# Altium PCB rpi-hat-v4a.PcbDoc
Units mm, origin at the board's own origin, x right, y up, seen from the top; angles counter-clockwise.
Board outline 64 x 55 mm, 2 copper layers (Top Layer, Bottom Layer), stack 1.572 mm thick; 44 components, 58 nets, 496 pads, 94 vias.
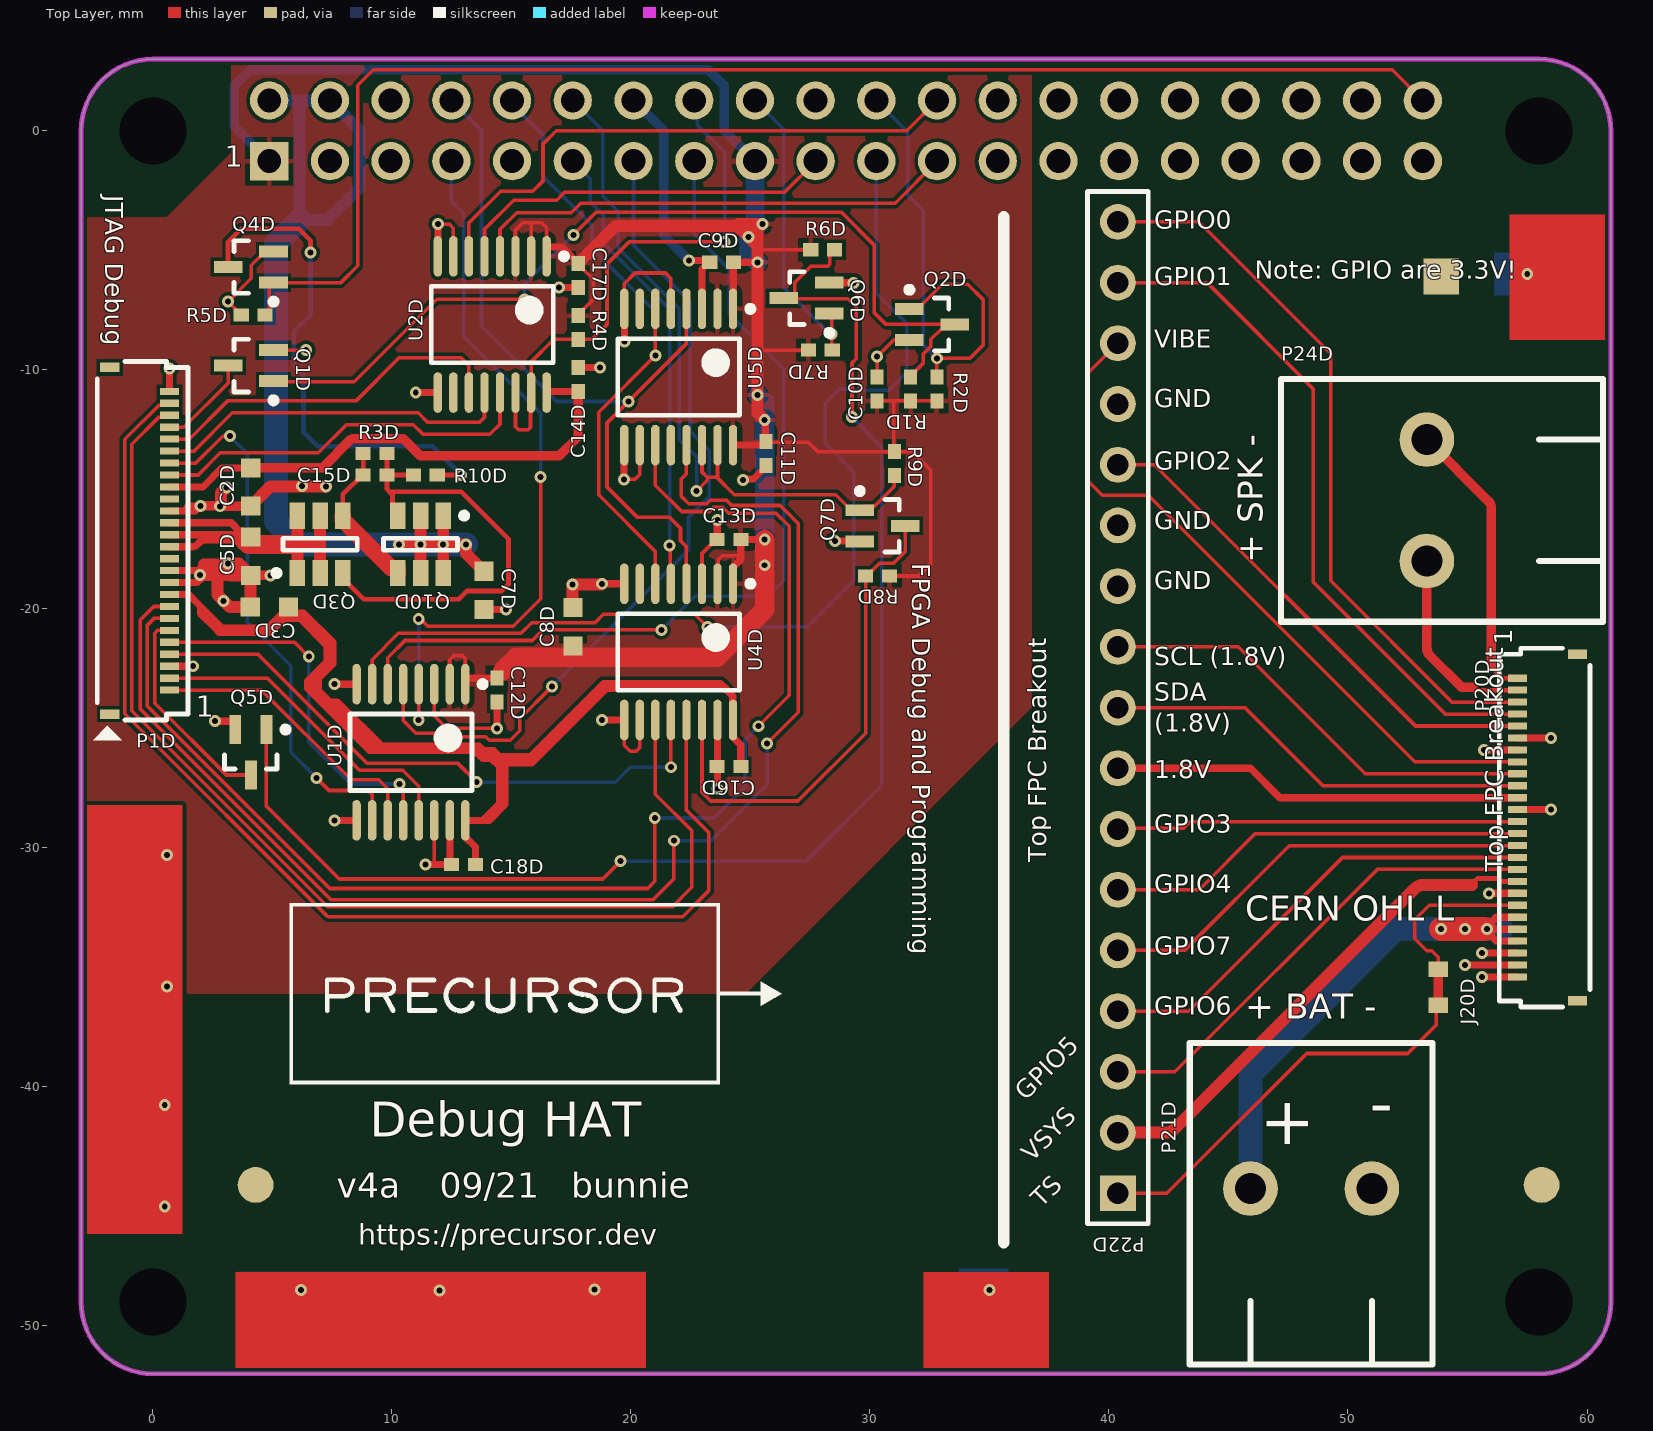
[diagram p0: Top Layer view]
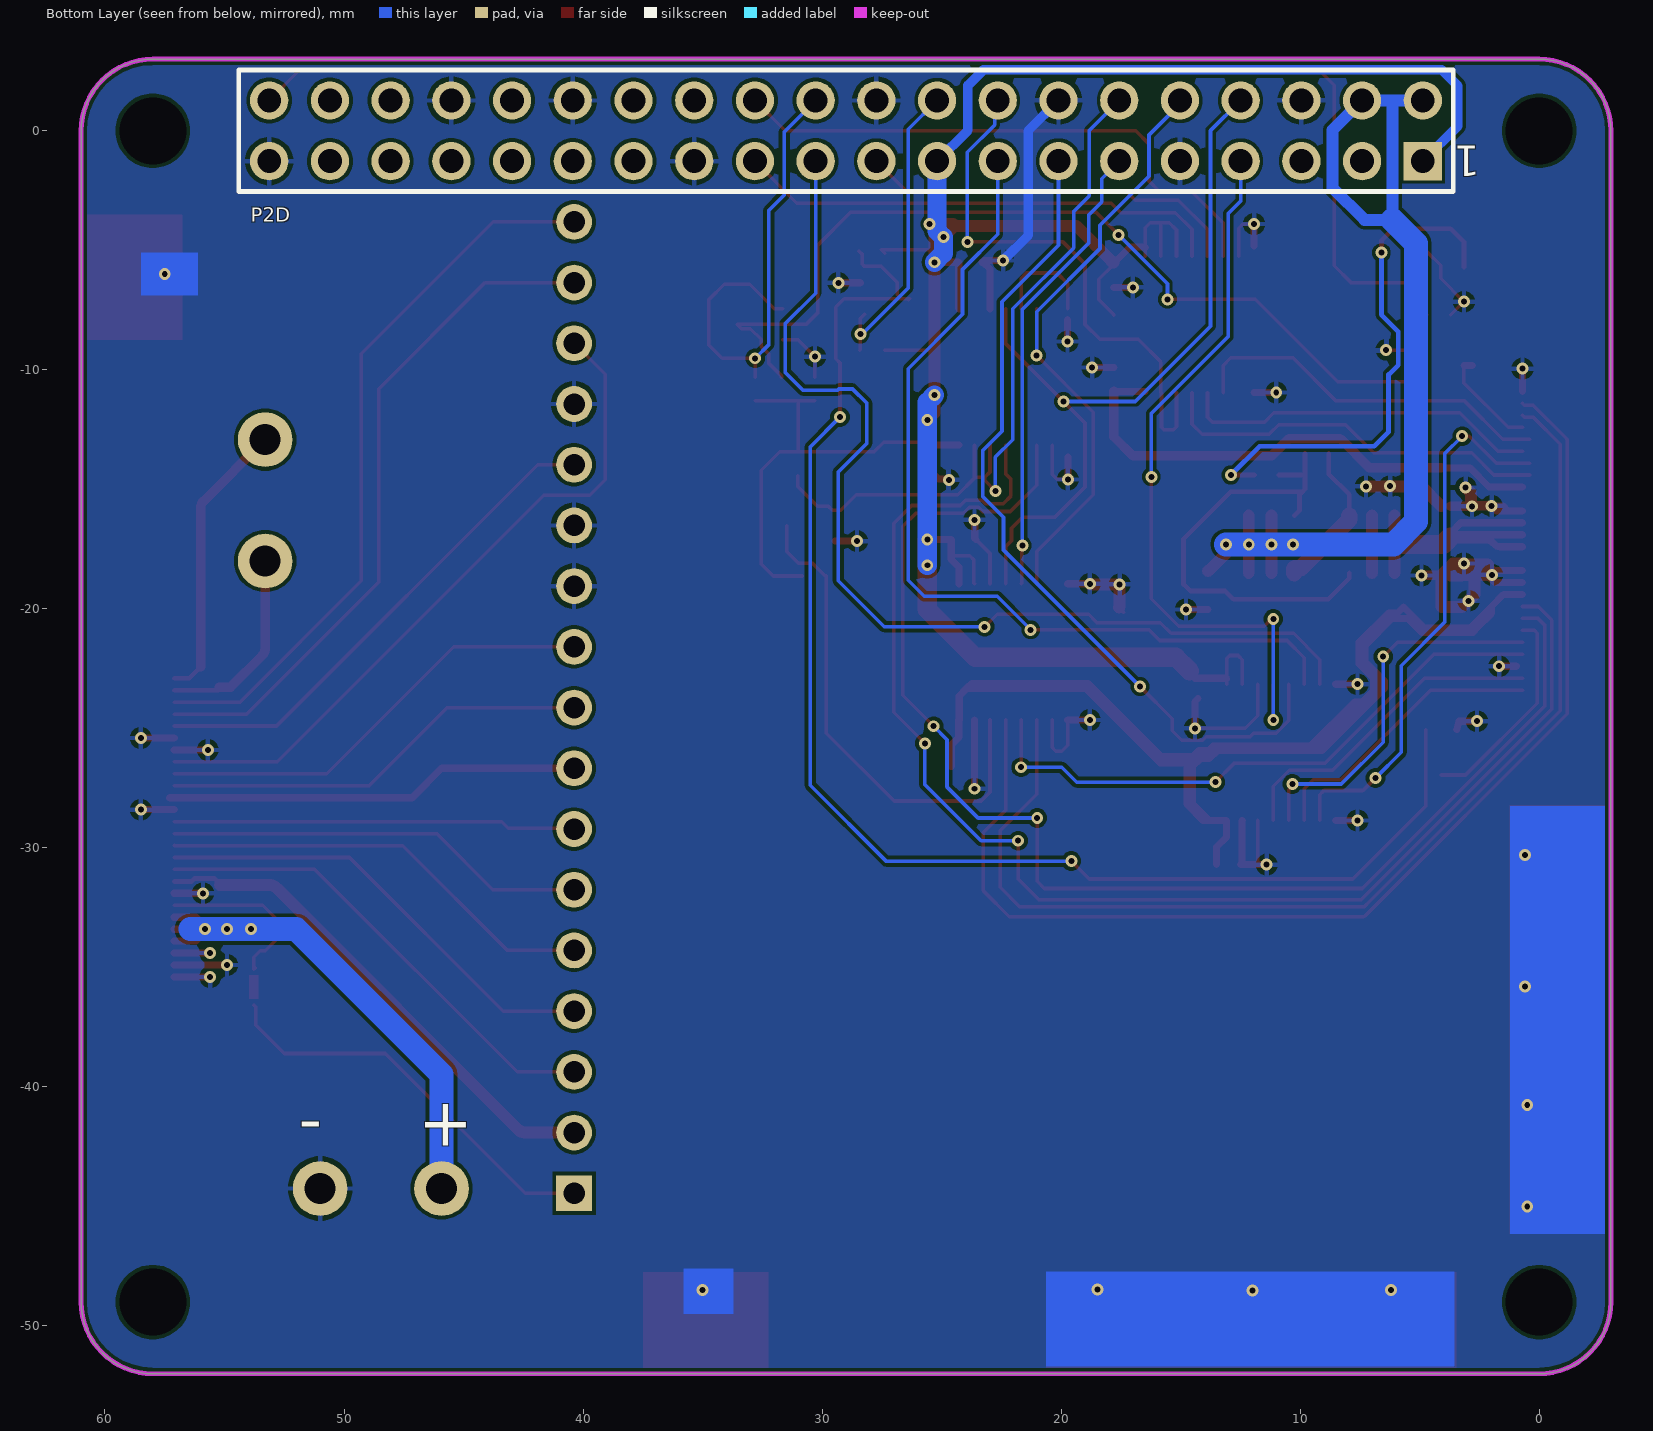
[diagram p1: Bottom Layer view, seen from below]

## Layer stack, top to bottom
Top Solder (Pantone 7452C): solder mask 0.01, Solder Resist, Dk 3.5
Top Layer: signal copper 0.036
Dielectric 2: prepreg 1.5, FR-4, Dk 4.2
Bottom Layer: signal copper 0.036
Bottom Solder (Pantone 7452C): solder mask 0.01, Solder Resist, Dk 3.5

## Board outline
-3,-49 -3,0 cw(c0,0) 0,3 58,3 cw(c58,0) 61,0 61,-49 cw(c58,-49) 58,-52 0,-52 cw(c0,-49)

## Design rules (kind name [scope] priority, off if disabled: settings)
Clearance [All] p1: gap=0.15 ignorepadtopadclearanceinfootprint=FALSE
DiffPairsRouting [All] p1: maxlimit=0.127 minlimit=0.127 mostfreqgap=0.127 toplayer_minwidth=0.3 toplayer_maxwidth=0.561 toplayer_prefwidth=0.561 bottomlayer_minwidth=0.3 bottomlayer_maxwidth=0.561 bottomlayer_prefwidth=0.561 impedanceprofiledriven=TRUE impedanceprofileid={78217CE3-51FE-490B-95B5-2C22C78E4475} impedanceprofilevalue=90.000000 maxuncoupledlength=12.7
HoleSize [All] p1: absolutevalues=TRUE maxlimit=4 minlimit=0.025 maxpercent=80.000 minpercent=20.000
MinimumSolderMaskSliver [All] p1 off: minsoldermaskwidth=0.254
PolygonConnect [All] p1: connectstyle=Relief reliefconductorwidth=0.2 reliefentries=4 polygonreliefangle="90 Angle" airgapwidth=0.2
RoomDefinition breakout [InComponentClass('breakout')] p1 off: confinementstyle=ConfineIn formatcopy=TRUE lockcomponents=FALSE outline 62,-50.25 64.5,-50.25 64.5,-16.5 62,-16.5
RoomDefinition debug [InComponentClass('debug')] p2 off: confinementstyle=ConfineIn formatcopy=TRUE lockcomponents=FALSE outline 73.943,-50.777 75.467,-50.777 75.467,-38.331 73.943,-38.331
RoutingVias [All] p1: holewidth=0.25 width=0.5 viastyle="Through Hole" minholewidth=0.25 minwidth=0.5 maxholewidth=0.25 maxwidth=0.5
SilkToSilkClearance [All] p1 off: silktosilkclearance=0.254
SilkToSolderMaskClearance [IsPad] p1 off: minsilkscreentomaskgap=0.254 clearancetoexposedcopper=TRUE
SolderMaskExpansion [All] p1: expansion=0.102 istentingtop=FALSE
Width [All] p1: maxlimit=3 minlimit=0.15 preferedwidth=0.15
25 further rules are at their usual default settings.

## Classes and differential pairs
component class breakout: J20D P20D P21D P22D P24D
component class debug: C2D C3D C5D C7D C8D C9D C10D C11D C12D C13D C14D C15D C16D C17D C18D NT1D P1D P2D Q1D Q2D Q3D Q4D Q5D Q6D Q7D Q10D R1D R2D R3D R4D R5D R6D R7D R8D R9D R10D U1D U2D U4D U5D

## Components (designator, comment, footprint, x,y, rotation, side; value= is the part's Value field where it differs from the comment)
C2D "10uF, 6.3V, X5R" B_CAP0603 4.1,-14.9 r270 top
C3D "10uF, 6.3V, X5R" B_CAP0603 4.876,-19.923 r180 top
C5D "10uF, 6.3V, X5R" B_CAP0603 4.1,-17.8 r270 top
C7D "10uF, 6.3V, X5R" B_CAP0603 13.85,-19.225 r270 top
C8D "10uF, 6.3V, X5R" B_CAP0603 17.575,-20.75 r90 top
C9D "0.1uF, 10V, X5R" B_CAP0402 23.8,-5.5 r180 top
C10D "0.1uF, 10V, X5R" B_CAP0402 30.3,-10.8 r90 top
C11D "0.1uF, 10V, X5R" B_CAP0402 25.65,-13.5 r270 top
C12D "0.1uF, 10V, X5R" B_CAP0402 14.4,-23.4 r270 top
C13D "0.1uF, 10V, X5R" B_CAP0402 24.1,-17.1 r180 top
C14D "0.1uF, 10V, X5R" B_CAP0402 17.8,-10.4 r90 top
C15D "0.1uF, 10V, X5R" B_CAP0402 9.3,-14.4 r0 top
C16D "0.1uF, 10V, X5R" B_CAP0402 24.1,-26.6 r180 top
C17D "0.1uF, 10V, X5R" B_CAP0402 17.8,-6.05 r270 top
C18D "0.1uF, 10V, X5R" B_CAP0402 13,-30.7 r180 top
J20D "TP (DNP)" RESTAP-0603 53.775,-35.825 r90 top
P1D "26-pin FPC" HRS_FH34SRJ-26S-0.5SH(50) 0.7,-17.15 r270 top
P2D "Header 20X2" SAMTEC_SSW-120-01-F-D 4.87,1.27 r0 bottom
P20D "26-pin FPC" HRS_FH34SRJ-26S-0.5SH(50) 57.1,-29.15 r90 top
P21D "1716060000" weidmuller_1716060000 45.92,-44.25 r0 top
P22D "Header 17" HDR1X17 40.375,-44.45 r90 top
P24D "1716060000" weidmuller_1716060000 53.3,-18 r90 top
Q1D "DMG1012UW-7" SOT323-3AN 4.1,-9.825 r180 top
Q2D "DMG1012UW-7" SOT323-3AN 32.6,-8.1 r0 top
Q3D "Si3493DDV" SOT26A-6N 7,-17.3 r90 top
Q4D "DMG1012UW-7" SOT323-3AN 4.1,-5.7 r180 top
Q5D "DMG1012UW-7" SOT323-3AN 4.1,-26 r270 top
Q6D "DMG1012UW-7" SOT323-3AN 27.35,-7 r180 top
Q7D "DMG1012UW-7" SOT323-3AN 30.525,-16.525 r0 top
Q10D "Si3493DDV" SOT26A-6N 11.2,-17.3 r270 top
R1D "4.7k, 1%" B_RES0402 31.7,-10.8 r270 top
R2D "4.7k, 1%" B_RES0402 32.8,-10.8 r270 top
R3D "4.7k, 1%" B_RES0402 9.3,-13.5 r0 top
R4D "4.7k, 1%" B_RES0402 17.8,-8.225 r90 top
R5D "4.7k, 1%" B_RES0402 4.2,-7.7 r0 top
R6D "4.7k, 1%" B_RES0402 28.025,-4.975 r180 top
R7D "4.7k, 1%" B_RES0402 27.925,-9.175 r180 top
R8D "4.7k, 1%" B_RES0402 30.325,-18.625 r0 top
R9D "4.7k, 1%" B_RES0402 31.025,-13.925 r90 top
R10D "4.7k, 1%" B_RES0402 11.4,-14.4 r0 top
U1D "74AVC4T245PW" TSOP65P640-16AN 10.8,-26 r270 top
U2D "74AVC4T245PW" TSOP65P640-16AN 14.2,-8.1 r270 top
U4D "74AVC4T245PW" TSOP65P640-16AN 22,-21.8 r270 top
U5D "74AVC4T245PW" TSOP65P640-16AN 22,-10.3 r270 top

## Footprints (in the part's own frame and the unit in brackets; to place one, negate y for a bottom-side part, rotate by r counter-clockwise, add the part's x,y. Pads: shape width x height; smd on the part's side, far side on the other; paste and mask are expansions set on the pad)
B_CAP0402 [mm] "Capacitor 0402"
  rect 0.63x0.55 smd mask+0.07: 1(-0.5,0) 2(0.5,0)
  body extent -0.53,-0.27 0.53,0.28, height 0.4
B_CAP0603 [mm] "Capacitor 0603"
  rect 0.8x0.8 smd mask+0.07: 1(-0.8,0) 2(0.8,0)
  body extent -0.85,-0.45 0.85,0.45, height 0.9
B_RES0402 [mm] "Resistor 0402"
  rect 0.63x0.55 smd mask+0.07: 1(-0.5,0) 2(0.5,0)
  body extent -0.53,-0.27 0.53,0.28, height 0.4
HDR1X17 [mm] "Connector; Header; 17 Position"
  rect 1.5x1.5 hole 0.9: 1(0,0)
  round 1.5 hole 0.9: 2(2.54,0) 3(5.08,0) 4(7.62,0) 5(10.16,0) 6(12.7,0) 7(15.24,0) 8(17.78,0) 9(20.32,0) 10(22.86,0) 11(25.4,0) 12(27.94,0) 13(30.48,0) 14(33.02,0) 15(35.56,0) 16(38.1,0) 17(40.64,0)
  silkscreen extent -1.27,-1.27 41.91,1.27
HRS_FH34SRJ-26S-0.5SH(50) [mm] "Top/bottom entry, back-lock 0.3mm thick FPC, 26 pins"
  rect 0.4x0.8 smd mask+0.07: 0(-7.25,-2.5) 0(7.25,-2.5)
  rect 0.3x0.8 smd mask+0.07: 1(6.25,0) 2(5.75,0) 3(5.25,0) 4(4.75,0) 5(4.25,0) 6(3.75,0) 7(3.25,0) 8(2.75,0) 9(2.25,0) 10(1.75,0) 11(1.25,0) 12(0.75,0) 13(0.25,0) 14(-0.25,0) 15(-0.75,0) 16(-1.25,0) 17(-1.75,0) 18(-2.25,0) 19(-2.75,0) 20(-3.25,0) 21(-3.75,0) 22(-4.25,0) 23(-4.75,0) 24(-5.25,0) 25(-5.75,0) 26(-6.25,0)
  silkscreen extent -7.5,-3.03 7.5,0.77, body extent -7.5,-3.02 7.5,0.78, height 1
RESTAP-0603 [mm] "0603 Power tap, cut-trace style"
  rect 0.65x0.8 smd: 1(-0.75,0) 1(0.75,0)
  Top Layer region: -0.5,-0.2 0.5,-0.2 0.5,0.2 -0.5,0.2
  body extent -0.8,-0.4 0.8,0.4, height 0.8
SAMTEC_SSW-120-01-F-D [mm] "2x20 2.54mm female header with standard solder tails"
  rect 1.6x1.6 hole 1: 1(0,2.54)
  round 1.6 hole 1: 2(0,0) 3(2.54,2.54) 4(2.54,0) 5(5.08,2.54) 6(5.08,0) 7(7.62,2.54) 8(7.62,0) 9(10.16,2.54) 10(10.16,0) 11(12.7,2.54) 12(12.7,0) 13(15.24,2.54) 14(15.24,0) 15(17.78,2.54) 16(17.78,0) 17(20.32,2.54) 18(20.32,0) 19(22.86,2.54) 20(22.86,0) 21(25.4,2.54) 22(25.4,0) 23(27.94,2.54) 24(27.94,0) 25(30.48,2.54) 26(30.48,0) 27(33.02,2.54) 28(33.02,0) 29(35.56,2.54) 30(35.56,0) 31(38.1,2.54) 32(38.1,0) 33(40.64,2.54) 34(40.64,0) 35(43.18,2.54) 36(43.18,0) 37(45.72,2.54) 38(45.72,0) 39(48.26,2.54) 40(48.26,0)
  silkscreen extent -1.27,-1.27 49.53,3.81, body extent -1.53,-1.2 49.78,3.75, height 8.51
SOT26A-6N [mm] "SOT23, 6-Leads, Body 2.9x1.7mm, Pitch 0.95mm, Lead Span 2.8mm, IPC Medium Density"
  rect 1.1x0.65 smd: 1(-1.2,0.95) 2(-1.2,0) 3(-1.2,-0.95) 4(1.2,-0.95) 5(1.2,0) 6(1.2,0.95)
  silkscreen extent -1.32,-1.55 0.25,1.95, body extent -0.9,-1.55 0.9,1.55, height 1.45
SOT323-3AN [mm] "SOT323, 3-Leads, Body 2.0x1.3mm, Pitch 0.65mm, Lead Span 2.1mm, IPC Medium Density"
  rect 1.2x0.5 smd: 1(-0.95,0.65) 2(-0.95,-0.65) 3(0.95,0)
  silkscreen extent -1.07,-1.1 0.7,1.57, body extent -0.7,-1.1 0.7,1.1, height 1
TSOP65P640-16AN [mm] "TSOP, 16-Leads, Body 5x4.4mm, Pitch 0.65mm, IPC Medium Density"
  oval 1.7x0.35 smd: 1(-2.85,2.275) 2(-2.85,1.625) 3(-2.85,0.975) 4(-2.85,0.325) 5(-2.85,-0.325) 6(-2.85,-0.975) 7(-2.85,-1.625) 8(-2.85,-2.275) 9(2.85,-2.275) 10(2.85,-1.625) 11(2.85,-0.975) 12(2.85,-0.325) 13(2.85,0.325) 14(2.85,0.975) 15(2.85,1.625) 16(2.85,2.275)
  silkscreen extent -2.97,-2.55 1.6,3.13, body extent -2.25,-2.55 2.25,2.55, height 1.1
weidmuller_1716060000 [mil]
  round 90 hole 51.18: 1(0,0) 2(200,0)
  silkscreen extent -100,-290 300,240

## Part data
C2D C3D C5D C7D C8D: library part "Cap Semi", "Capacitor (Semiconductor SIM Model)", MPN=CL10A106MQ8NNNC, MYPN=C-106-6.3-X5R-0603, VENDOR=Samsung
C9D C10D C11D C12D C13D C14D C15D C16D C17D C18D: library part "Cap Semi", "Capacitor (Semiconductor SIM Model)", MPN=CL05A104KP5NNNC, MYPN=C-104-10-X5R-0402, VENDOR=Samsung
J20D: library part CON1, "Connector", MPN=DNP, MYPN=J-TP-PWRTAP-0603, VENDOR=DNP
P1D P20D: library part FPC-26, "26 Pin FPC header", MPN=FH34SRJ-26S-0.5SH(99), MYPN=J-FPC-0.5mm-26-0.3mm-T/B, VENDOR=Hirose
  P20D: System=Connector
P2D: "Header, 20-Pin, Dual row", MPN=CS25402-40G-S85-C, LatestRevisionDate=17-Jul-2002, LatestRevisionNote="Re-released for DXP Platform.", MYPN=P-SSW-120-01-F-D, Publisher="Altium Limited", VENDOR=Kaweei
P21D P24D: library part "Header 2", "Header, 2-Pin", LatestRevisionDate=17-Jul-2002, LatestRevisionNote="Re-released for DXP Platform.", MPN=1716060000, MYPN=J-TB-2P-5.08, Publisher="Altium Limited", VENDOR=Weidmuller
P22D: "Header, 17-Pin", LatestRevisionDate=17-Jul-2002, LatestRevisionNote="Re-released for DXP Platform.", Publisher="Altium Limited"
Q1D Q2D Q4D Q5D Q6D Q7D: library part MOSFET-N, "N-Channel MOSFET", LatestRevisionDate=17-Jul-2002, LatestRevisionNote="Re-released for DXP Platform.", MPN=DMG1012UW-7, MYPN=Q-DMG1012UW-7, PackageReference=E3, PackageVersion=1995/1996, Published=8-Jun-2000, Publisher="Altium Limited", VENDOR="Diodes Inc"
Q3D Q10D: "P-channel 20V 8A 32mOhm @ -2.5V", MPN=SI3493DDV-T1-GE3, MYPN=Q-SI3493DDV-T1-GE3, VENDOR="Vishay Siliconix"
R1D R2D R3D R4D R5D R6D R7D R8D R9D R10D: library part Res1, "Resistor", MPN=ANY, MYPN=R-472-1P-1_16W-0402, VENDOR=ANY
U1D U2D U4D U5D: library part 74AVC4T245, "4-bit dual supply translating transceiver with configurable voltage translation; 3-state; standard pinout", MPN=74AVC4T245PW, MYPN=U-74AVC4T245PW, VENDOR=Nexperia

## Free pads (board coordinates)
  round 2.7 hole 2.8 unplated mask+1.2: 0(0,-49) 0(0,0) 0(58,-49) 0(58,0)
  rect 2.54x0.051 on Top Overlay: 1(47.212,-29.144) 1(47.212,-29.094) 1(47.212,-29.043) 1(47.212,-28.992) 1(47.212,-28.941) 1(47.212,-28.89) 1(47.212,-28.84) 1(47.212,-28.789) 1(47.212,-28.738) 1(47.212,-28.687) 1(47.212,-28.636) 1(47.212,-28.586) 1(47.314,-28.382) 1(51.632,-28.382) 1(51.733,-29.144) 1(51.733,-28.738) 1(51.733,-28.586) 1(51.733,-29.195) 1(51.733,-29.094) 1(51.733,-29.043) 1(51.733,-28.992) 1(51.733,-28.789) 1(51.733,-28.687) 1(51.733,-28.636)
  rect 2.591x0.051 on Top Overlay: 1(47.238,-29.297) 1(47.238,-28.535) 1(47.238,-29.246) 1(47.238,-29.195) 1(47.238,-28.484) 1(47.288,-29.348) 1(51.657,-29.348) 1(51.708,-29.297) 1(51.708,-29.246) 1(51.708,-28.535) 1(51.708,-28.484) 1(51.708,-28.433)
  rect 2.642x0.051 on Top Overlay: 1(47.263,-28.433)
  rect 0.102x0.051 on Top Overlay: 1(47.314,-26.096) 1(48.381,-31.329) 1(50.565,-31.329) 1(51.632,-26.096)
  rect 0.152x0.051 on Top Overlay: 1(47.339,-31.634) 1(51.606,-31.634)
  rect 0.254x0.051 on Top Overlay: 1(47.339,-31.583) 1(47.339,-26.147) 1(48.355,-31.278) 1(50.59,-31.278) 1(51.606,-31.583) 1(51.606,-26.147)
  rect 0.356x0.051 on Top Overlay: 1(47.339,-26.198) 1(48.304,-31.227) 1(50.641,-31.227) 1(51.606,-26.198) 1(51.606,-31.532)
  rect 0.406x0.051 on Top Overlay: 1(47.365,-31.532)
  rect 0.508x0.051 on Top Overlay: 1(47.365,-31.481) 1(47.365,-26.249) 1(51.581,-31.481)
  rect 0.61x0.051 on Top Overlay: 1(47.365,-26.3) 1(51.581,-31.43) 1(51.581,-26.3)
  rect 0.66x0.051 on Top Overlay: 1(47.39,-31.43)
  rect 0.762x0.051 on Top Overlay: 1(47.39,-31.38) 1(47.39,-26.35) 1(51.556,-31.38)
  rect 0.864x0.051 on Top Overlay: 1(47.39,-31.329) 1(47.39,-26.401) 1(49.473,-25.334) 1(51.556,-31.329) 1(51.556,-26.401)
  rect 0.965x0.051 on Top Overlay: 1(47.39,-26.452) 1(49.473,-25.385) 1(49.473,-25.487) 1(49.473,-25.436) 1(51.556,-26.452)
  rect 1.118x0.051 on Top Overlay: 1(47.415,-31.227) 1(47.415,-26.503) 1(49.498,-25.842) 1(51.53,-31.227) 1(51.53,-26.503)
  rect 1.219x0.051 on Top Overlay: 1(47.415,-26.554) 1(49.498,-26.096) 1(51.53,-26.554)
  rect 1.016x0.051 on Top Overlay: 1(47.415,-31.278) 1(49.498,-25.538) 1(51.53,-31.278)
  rect 2.337x0.051 on Top Overlay: 1(47.415,-29.398) 1(50.768,-27.874) 1(51.53,-29.398)
  rect 2.286x0.051 on Top Overlay: 1(47.492,-28.332) 1(48.203,-27.874) 1(51.505,-28.332)
  rect 2.134x0.051 on Top Overlay: 1(47.568,-29.449) 1(48.076,-27.925) 1(50.87,-27.925) 1(51.378,-29.449)
  rect 1.93x0.051 on Top Overlay: 1(47.619,-31.024) 1(47.873,-29.652) 1(47.923,-29.703) 1(47.923,-28.027) 1(48.025,-30.008) 1(48.025,-29.957) 1(50.921,-30.008) 1(50.921,-29.957) 1(51.022,-29.703) 1(51.022,-28.027) 1(51.327,-31.024)
  rect 1.829x0.051 on Top Overlay: 1(47.619,-31.075) 1(47.72,-30.821) 1(47.771,-30.77) 1(47.771,-30.719) 1(47.771,-28.23) 1(47.822,-30.668) 1(47.822,-29.602) 1(47.822,-29.551) 1(47.822,-28.179) 1(47.873,-28.128) 1(48.025,-30.16) 1(48.025,-30.11) 1(50.921,-30.16) 1(50.921,-30.11) 1(51.124,-29.602) 1(51.124,-28.179) 1(51.175,-30.719) 1(51.175,-29.551) 1(51.175,-28.23) 1(51.225,-30.821) 1(51.327,-31.075)
  rect 2.032x0.051 on Top Overlay: 1(47.619,-28.281) 1(48.025,-29.906) 1(48.025,-29.856) 1(48.025,-29.805) 1(50.921,-29.906) 1(50.921,-29.856) 1(50.971,-29.805) 1(51.327,-28.281)
  rect 1.778x0.051 on Top Overlay: 1(47.644,-31.126) 1(47.847,-30.618) 1(47.847,-30.567) 1(47.898,-30.516) 1(47.949,-30.414) 1(50.997,-30.414) 1(51.048,-30.516) 1(51.098,-30.618) 1(51.098,-30.567) 1(51.149,-30.668) 1(51.302,-31.126)
  rect 1.88x0.051 on Top Overlay: 1(47.644,-30.973) 1(47.695,-30.922) 1(47.695,-30.872) 1(47.746,-29.5) 1(47.898,-28.078) 1(48.05,-30.059) 1(50.946,-30.059) 1(51.048,-28.078) 1(51.098,-29.652) 1(51.098,-28.128) 1(51.2,-29.5) 1(51.2,-30.77) 1(51.251,-30.872) 1(51.302,-30.973) 1(51.302,-30.922)
  rect 1.727x0.051 on Top Overlay: 1(47.669,-31.176) 1(47.923,-30.465) 1(47.974,-30.364) 1(48.025,-30.313) 1(48.025,-30.262) 1(48.025,-30.211) 1(49.498,-26.401) 1(50.921,-30.262) 1(50.921,-30.211) 1(50.971,-30.364) 1(51.022,-30.465)
  rect 1.981x0.051 on Top Overlay: 1(47.949,-29.754) 1(48,-27.976) 1(49.473,-26.452) 1(50.946,-27.976) 1(50.997,-29.754)
  rect 4.724x0.051 on Top Overlay: 1(49.473,-27.671) 1(49.473,-27.722) 1(49.473,-27.366)
  rect 4.623x0.051 on Top Overlay: 1(49.473,-27.62) 1(49.473,-27.57) 1(49.473,-27.519) 1(49.473,-27.468)
  rect 4.928x0.051 on Top Overlay: 1(49.473,-27.214)
  rect 5.334x0.051 on Top Overlay: 1(49.473,-26.909) 1(49.473,-26.96)
  rect 5.436x0.051 on Top Overlay: 1(49.473,-26.858) 1(49.473,-26.604)
  rect 2.184x0.051 on Top Overlay: 1(49.473,-26.503)
  rect 1.27x0.051 on Top Overlay: 1(49.473,-26.147) 1(49.473,-26.3) 1(49.473,-26.249) 1(49.473,-26.198)
  rect 1.067x0.051 on Top Overlay: 1(49.473,-25.792) 1(49.473,-25.741) 1(49.473,-25.69) 1(49.473,-25.639) 1(49.473,-25.588)
  rect 4.826x0.051 on Top Overlay: 1(49.473,-27.824) 1(49.473,-27.773) 1(49.473,-27.316)
  rect 5.029x0.051 on Top Overlay: 1(49.473,-27.163)
  rect 5.131x0.051 on Top Overlay: 1(49.473,-27.062)
  rect 5.232x0.051 on Top Overlay: 1(49.473,-27.011)
  rect 5.537x0.051 on Top Overlay: 1(49.473,-26.808) 1(49.473,-26.757) 1(49.473,-26.655)
  rect 5.639x0.051 on Top Overlay: 1(49.473,-26.706)
  rect 2.489x0.051 on Top Overlay: 1(49.473,-26.554) 1(51.759,-28.941) 1(51.759,-28.89) 1(51.759,-28.84)
  rect 1.473x0.051 on Top Overlay: 1(49.473,-26.35)
  rect 1.168x0.051 on Top Overlay: 1(49.473,-26.046) 1(49.473,-25.995) 1(49.473,-25.944) 1(49.473,-25.893)
  rect 4.877x0.051 on Top Overlay: 1(49.498,-27.265)
  rect 4.674x0.051 on Top Overlay: 1(49.498,-27.417)
  rect 5.08x0.051 on Top Overlay: 1(49.498,-27.112)
  rect 1.676x0.051 on Top Overlay: 1(50.946,-30.313) 1(51.302,-31.176)
  rect 0.711x0.051 on Top Overlay: 1(51.581,-26.35)
  rect 0.457x0.051 on Top Overlay: 1(51.606,-26.249)
  round 1.5 smd mask+1.5: 2(4.3,-44.1) 3(58.1,-44.1)
  rect 1.5x1.5 smd mask+1.5: 4(53.9,-6.1)

## Via types
v1: diameter 0.5, hole 0.25, Top Layer to Bottom Layer, tented both sides, 94 vias

## Nets (pads, with @x,y where several pads share a name; then routed paths per layer and width w, separated by ;. In a path a pad name is that pad's centre, name@x,y a point inside that pad or via, vN(x,y) a via of type N, cw(c..) or ccw(c..) an arc to the next point about the centre after c; other vN are vias at no path point)
B2B_CTL: Q4D.3 R10D.2 | length 21.7
  Top Layer w0.2: Q4D.3 3.15,-4.65 3.7,-4.1 6.1,-4.1 6.6,-4.6 v1(6.6,-5.1) ; R10D.2 v1(12.9,-14.4)
  Bottom Layer w0.2: v1(6.6,-5.1) 6.6,-7.7 5.9,-8.4 5.9,-9.8 6.3,-10.2 6.3,-12.6 6.9,-13.2 11.7,-13.2 v1(12.9,-14.4)
B2B_G: C15D.2 Q3D.3 Q10D.3 R3D.2 R10D.1 | length 19.3
  Top Layer w0.2: Q3D.3 7.95,-18.725 8.825,-19.6 12.8,-19.6 13.15,-19.25 14.6,-19.25 14.875,-18.975 14.875,-17.075 12.9,-15.1 9.925,-15.1 9.912,-15.112 ; R3D.2 C15D.2 ; Q10D.3 10.025,-15.875 10.025,-15.225 9.912,-15.112 ; R10D.1 C15D.2 ; C15D.2 9.8,-15 9.912,-15.112
B2B_S: C15D.1 Q3D.4 Q10D.4 R3D.1 | length 6.5
  Top Layer w0.2: Q3D.4 7.95,-15.21 8.8,-14.36 R3D.1
  Top Layer w0.7: Q3D.4 7.95,-16.275 9.975,-18.3 10.225,-18.3 10.25,-18.325 Q10D.4
CHG_TS: J20D.1 P20D.20 P22D.1 | length 24.3
  Top Layer w0.15: P22D.1 42.425,-44.45 48.275,-38.6 52.5,-38.6 53.7,-37.4 53.7,-36.65 J20D.1@53.775,-36.575 ; J20D.1@53.725,-35.025 53.775,-35.075 53.775,-34.575 53.5,-34.3 53.3,-34.3 52.8,-33.8 52.8,-33 53.4,-32.4 P20D.20
CRESET_3V: Q1D.1 Q2D.3 R1D.1 | length 38.6
  Top Layer w0.15: Q1D.1 5.075,-10.5 8.425,-10.5 11.875,-7.05 v1(15.55,-7.05) ; v1(17.6,-4.35) 18.55,-3.4 28.8,-3.4 30.175,-4.775 30.175,-7.6 30.675,-8.1 Q2D.3 33.375,-8.275 33,-8.275 32.55,-8.725 32.55,-9.025 32.225,-9.35 32.225,-9.735 31.7,-10.26 R1D.1
  Bottom Layer w0.15: v1(15.55,-7.05) 15.55,-6.4 v1(17.6,-4.35)
CRESET_B: P1D.23 Q1D.3 | length 4.3
  Top Layer w0.15: P1D.23 0.8,-12.4 0.9,-12.4 1.3,-12.4 3.15,-10.55 Q1D.3
  Top Layer w0.3: Q1D.3@2.8,-9.825 Q1D.3
CRESET_N_3V: P2D.22 Q2D.1 R2D.1 | length 20.5
  Top Layer w0.15: Q2D.1 32,-7.45 33.025,-6.425 34.1,-6.425 34.75,-7.075 34.75,-8.95 34.184,-9.516 v1(32.8,-9.516) R2D.1
  Bottom Layer w0.15: P2D.22 31.575,-0.035 31.575,-2.675 32.225,-3.325 32.225,-8.941 v1(32.8,-9.516)
DRV_UP5K_N: P2D.16 R4D.1 U2D.14 U2D.15 | length 23
  Top Layer w0.15: U2D.14 15.175,-12.375 15.3,-12.5 15.7,-12.5 15.8,-12.4 15.8,-10.975 U2D.15 15.825,-9.675 16.775,-8.725 R4D.1 18.375,-8.725 19,-8.1 19,-5.575 19.925,-4.65 v1(23.925,-4.65)
  Bottom Layer w0.15: P2D.16 22.78,1.14 22.78,0.245 23.925,-0.9 v1(23.925,-4.65)
F_UART_RX: P1D.25 U4D.13 | length 49.9
  Top Layer w0.15: P1D.25 0.625,-11.475 0.257,-11.475 -1.131,-12.863 ccw(c-1.025,-12.969) -1.175,-12.969 -1.175,-22.526 -1.175,-24.39 7.266,-32.831 ; 7.266,-32.832 ccw(c7.372,-32.725) 7.372,-32.875 10.087,-32.875 22.175,-32.875 23.25,-31.8 23.25,-29.35 22.325,-28.425 U4D.13
F_UART_TX: P1D.24 U4D.11 | length 48
  Top Layer w0.15: P1D.24 0.625,-11.975 0.257,-11.975 -0.875,-13.107 -0.875,-24.266 7.066,-32.207 7.33,-32.47 21.73,-32.47 22.55,-31.65 22.55,-29.275 21.025,-27.75 U4D.11
GND: C2D.2 C3D.2 C5D.2 C7D.2 C8D.2 C9D.2 C10D.2 C11D.2 C12D.2 C13D.2 C14D.2 C16D.2 C17D.2 C18D.2 P1D.3 P1D.10 P1D.11 P1D.16 P1D.26 P2D.6 P2D.9 P2D.14 P2D.20 P2D.25 P2D.30 P2D.34 P2D.39 P20D.6 P20D.7 P20D.12 P20D.19 P20D.24 P20D.25 P20D.26 P21D.2 P22D.11 P22D.12 P22D.14 Q1D.2 Q2D.2 Q4D.2 Q5D.2 Q6D.2 Q7D.2 R5D.1 U1D.3 U1D.8 U1D.9 U1D.14 U1D.15 U2D.7 U2D.8 U2D.9 U4D.3 U4D.8 U4D.9 U4D.10 U4D.15 U5D.3 U5D.5 U5D.8 U5D.9 U5D.10 | length 101.9
  Top Layer w0.15: R5D.1 v1(3.15,-7.15) 4.125,-6.175 4.125,-5.625 4.7,-5.05 Q4D.2 ; Q1D.2 v1(6.4,-9.175) ; 11.725,-30.7 11.775,-30.65 U1D.14 ; U1D.3 11.775,-24.475 12.3,-25 v1(14.4,-25) ; v1(11.927,-3.901) 12.401,-3.901 12.575,-4.075 U2D.7 ; C8D.2@17.375,-20.15 C8D.2 ; v1(19.719,-14.584) 20.166,-14.584 20.375,-14.375 U5D.10 ; U4D.9 19.725,-25.7 19.975,-25.95 20.225,-25.95 20.375,-25.8 U4D.10 ; U5D.8 19.725,-6.4 20.175,-5.95 21.45,-5.95 21.675,-6.175 U5D.5 ; U4D.3 22.975,-17.685 23.56,-17.1 C13D.2 ; C10D.2 v1(30.3,-9.45) 31,-8.75 Q2D.2
  Top Layer w0.3: P1D.10 1.875,-18.9 2.15,-18.625 2.15,-18.578 2.15,-18.25 ; P1D.11 v1@1.9,-18.4 ; P1D.16 1.3,-15.9 ; P1D.26 v1(0.7,-9.95) ; P1D.3@0.95,-22.4 v1(1.675,-22.4) ; v1@2,-18.4 v1@1.9,-18.4 ; 2.15,-18.15 v1@1.9,-18.4 ; v1(2.6,-24.7) 3.35,-24.7 Q5D.2 ; v1@2.792,-15.69 v1(2.809,-15.708) v1@2.848,-15.669 ; 3.692,-15.708 3.7,-15.7 ; v1(7.6,-28.85) U1D.9 ; v1(7.6,-23.15) U1D.8 ; v1(11,-10.95) U2D.9 ; v1(11.4,-30.7) 11.725,-30.7 C18D.2 12.435,-30.635 12.435,-28.86 U1D.15 ; U2D.8@11.927,-4.826 v1(11.927,-3.901) ; C7D.2 v1(14.775,-20.025) ; C12D.2@14.275,-23.75 14.4,-23.875 C12D.2 v1(14.4,-25) ; v1(17,-6.55) C17D.2 ; C14D.2 v1(18.7,-9.9) ; v1(18.8,-24.65) U4D.9 ; v1(18.8,-18.95) U4D.8 ; v1(19.719,-14.584) U5D.9@19.719,-13.659 ; v1(19.729,-8.815) U5D.8@19.729,-7.89 ; v1(22.425,-5.425) 23.225,-5.425 C9D.2 23.26,-5.5 22.975,-5.785 U5D.3 ; C13D.2@23.56,-17.1 23.613,-17.047 23.613,-16.287 v1(23.625,-16.275) ; v1(23.625,-27.525) U4D.15 ; v1(24.7,-14.6) 24.738,-14.562 25.128,-14.562 25.65,-14.04 C11D.2 ; Q6D.2@28.394,-6.358 v1(29.319,-6.358) ; v1(28.535,-17.166) Q7D.2@29.46,-17.166 ; v1(54.9,-34.9) P20D.25 ; v1(55.6,-35.4) P20D.26 ; v1(55.6,-34.4) P20D.24 ; v1(55.7,-25.9) P20D.7 ; v1(55.9,-31.9) P20D.19 ; P20D.12 v1(58.5,-28.4) ; P20D.6 v1(58.5,-25.4) ; 1.3,-15.9 1.78,-15.9 v1(1.989,-15.69) 1.51,-15.69 1.3,-15.9
  Top Layer w0.4: -0.75,-35.5 -0.75,-30.05 ; v1(1.989,-15.69) v1@2.792,-15.69 ; v1(2.809,-15.708) 3.692,-15.708 ; C5D.2@3.7,-18.6 C5D.2 v1(4.925,-18.6)
  Top Layer w0.5: v1(1.978,-18.578) 2.15,-18.578 2.686,-18.578 2.688,-18.58 ; 2.15,-18.15 3.135,-18.15 ccw(c3.132,-17.75) 3.227,-18.139 3.25,-18.15 3.7,-18.6 3.55,-18.6 3.244,-18.6 ccw(c3.104,-19.08) 3.104,-18.58 2.688,-18.58 ; v1@2.848,-15.669 2.848,-15.152 v1(3.075,-14.925) ; v1(3.15,-18.1) 3.6,-18.1 C5D.2 4.088,-18.612 4.088,-19.911 C3D.2 3.223,-19.923 2.7,-19.4 2.7,-18.592 2.688,-18.58 ; C2D.2 4.925,-14.875 v1(7.25,-14.875) ; C8D.2 17.55,-19.925 v1(17.55,-18.975) 18.775,-18.975 v1(18.8,-18.95)
  Bottom Layer w0.4: P2D.14 21.375,0.005 21.375,-4.375 v1(22.425,-5.425)
  other v1: 12,-48.525 6.2,-48.5 35,-48.5 18.475,-48.475 0.5,-45 0.5,-40.75 0.6,-35.8 0.6,-30.3 2.961,-19.661 6.239,-14.868 57.5,-6
GPIO0: P20D.3 P22D.17 | length 30.6
  Top Layer w0.15: P22D.17 43.76,-3.81 49.275,-9.325 49.275,-18.825 54.35,-23.9 P20D.3
GPIO1: P20D.4 P22D.16 | length 28.9
  Top Layer w0.15: P22D.16 44.1,-6.35 48.55,-10.8 48.55,-18.875 54.075,-24.4 P20D.4
GPIO2: P20D.5 P22D.13 | length 21.3
  Top Layer w0.15: P22D.13 41.895,-13.97 52.825,-24.9 P20D.5
GPIO3: P20D.13 P22D.7 | length 16.9
  Top Layer w0.15: P22D.7 40.41,-29.175 43.125,-29.175 43.4,-28.9 P20D.13
GPIO4: P20D.14 P22D.6 | length 17.7
  Top Layer w0.15: P22D.6 43.775,-31.75 46.125,-29.4 P20D.14
GPIO5: P20D.17 P22D.3 | length 20.2
  Top Layer w0.15: P22D.3 42.755,-39.37 51.225,-30.9 P20D.17
GPIO6: P20D.16 P22D.4 | length 20
  Top Layer w0.15: P22D.4 43.345,-36.83 49.773,-30.402 56.125,-30.402 ; 55.525,-30.402 55.527,-30.4 P20D.16
GPIO7: P20D.15 P22D.5 | length 18.6
  Top Layer w0.15: P22D.5 43.16,-34.29 47.541,-29.909 P20D.15@57.091,-29.909 ; P20D.15@57.1,-29.909 P20D.15@57.091,-29.909 ; P20D.15 P20D.15@57.091,-29.909
I2C0_SCL: P20D.9 P22D.10 | length 18.9
  Top Layer w0.15: P22D.10 45.415,-21.59 50.725,-26.9 P20D.9
I2C0_SDA: P20D.10 P22D.9 | length 18.7
  Top Layer w0.15: P22D.9 45.68,-24.13 48.954,-27.404 56.243,-27.404 ; 55.643,-27.404 55.648,-27.4 P20D.10
JTAG_TCK: P1D.2 U1D.13 | length 13.7
  Top Layer w0.15: P1D.2 4.8,-22.9 8.65,-26.75 10.45,-26.75 11.125,-27.425 U1D.13
JTAG_TCK_3V: P2D.7 U1D.4 | length 31.3
  Top Layer w0.15: v1(11.125,-24.65) U1D.4 ; v1(11.125,-20.425) 11.197,-20.425 11.497,-20.725 15.075,-20.725 16.225,-19.575 v1(16.225,-14.475)
  Bottom Layer w0.15: v1(11.125,-24.65) v1(11.125,-20.425) ; P2D.7 12.49,-2.94 13,-3.45 13,-8.6 16.225,-11.825 v1(16.225,-14.475)
JTAG_TDI: P1D.5 U1D.12 | length 15.8
  Top Layer w0.15: P1D.5 5.925,-21.4 v1(6.525,-22) ; v1(10.325,-27.325) 10.325,-27.42 10.475,-27.57 U1D.12
  Bottom Layer w0.15: v1(6.525,-22) 6.525,-25.575 8.275,-27.325 v1(10.325,-27.325)
JTAG_TDI_3V: P2D.13 U1D.5 | length 35.3
  Top Layer w0.15: U1D.5 10.475,-24.672 11.003,-25.2 11.95,-25.2 12.1,-25.35 13.925,-25.35 14.075,-25.5 14.95,-25.5 15.35,-25.1 15.35,-24.6 v1(16.7,-23.25)
  Bottom Layer w0.15: v1(16.7,-23.25) 22.413,-17.537 22.413,-16.163 23.275,-15.3 23.275,-13.375 22.475,-12.575 22.475,-7.15 20.11,-4.785 P2D.13
JTAG_TDO: P1D.1 U1D.11 | length 12.2
  Top Layer w0.15: P1D.1 4.55,-23.4 8.3,-27.15 9.45,-27.15 9.825,-27.525 U1D.11
JTAG_TDO_3V: P2D.15 U1D.6 | length 38.1
  Top Layer w0.15: U1D.6 9.825,-22.05 10.55,-21.325 15.875,-21.325 16.325,-20.875 v1(21.275,-20.875)
  Bottom Layer w0.15: v1(21.275,-20.875) 22.675,-19.475 25.725,-19.475 26.4,-18.8 26.4,-9.95 24.125,-7.675 24.125,-5.8 22.65,-4.325 P2D.15
JTAG_TMS: P1D.4 U4D.12 | length 25.4
  Top Layer w0.15: P1D.4 4.4,-21.9 8.95,-26.45 12.75,-26.45 v1(13.55,-27.25) ; v1(21.675,-26.625) U4D.12
  Bottom Layer w0.15: v1(13.55,-27.25) 19.35,-27.25 19.975,-26.625 v1(21.675,-26.625)
JTAG_TMS_3V: P2D.11 U4D.5 | length 19.4
  Top Layer w0.15: v1(21.625,-17.35) 21.65,-17.375 21.65,-18.925 U4D.5
  Bottom Layer w0.15: P2D.11 18.3,-2 18.3,-2.975 18.837,-3.512 18.837,-4.687 21.625,-7.475 v1(21.625,-17.35)
NetQ7D_3: Q7D.3 R8D.1 U4D.14 | length 20.9
  Top Layer w0.15: U4D.14 22.975,-27.675 23.338,-28.038 26.987,-28.038 29.825,-25.2 R8D.1 29.865,-18.625 30.39,-18.1 30.975,-18.1 31.475,-17.6 Q7D.3
P1.8V: C2D.1 C14D.1 P1D.18 U2D.16 | length 21.8
  Top Layer w0.3: P1D.18 2.1,-14.9 2.9,-14.1 C2D.1 ; U2D.16@16.5,-10.9 C14D.1
  Top Layer w0.4: C2D.1 7.1,-14.1 8.3,-12.9 8.315,-12.9 8.34,-12.875 10.475,-12.875 11.2,-13.6 17,-13.6 17.8,-12.8 C14D.1
P1.8V_T: C3D.1 C16D.1 C18D.1 P1D.9 U1D.16 U4D.16 | length 78.1
  Top Layer w0.3: P1D.9 1.5,-19.4 2,-19.9 ; C18D.1 13.5,-29.964 13.075,-29.539 U1D.16 13.8,-28.85 ; C16D.1 24.6,-25.7 24.285,-25.385 24.285,-24.66 U4D.16 24.265,-24.64 24.265,-23.64 23.95,-23.325 ; 2,-19.9 2.9,-20.8 ; 2,-19.9 2,-20.2 2.6,-20.8 ; 2.6,-20.8 2.9,-20.8 ; 2.6,-20.8 2.775,-20.975 4.925,-20.975 5.5,-20.4 6.153,-20.4 ; 2.9,-20.8 4.799,-20.8 C3D.1 C3D.1@5.926,-20.173 ; C3D.1@5.926,-20.173 6.153,-20.4 ; C3D.1@5.926,-20.173 6.298,-20.173 7.525,-21.4 7.525,-22.305 6.925,-22.905 ; 6.153,-20.4 7.3,-21.547 7.3,-22.225 ; 6.925,-23.375 6.925,-22.905 ; 6.925,-23.375 6.925,-23.425 7.4,-23.9 ; 6.925,-23.375 6.7,-23.15 6.7,-22.825 6.925,-22.6 ; 6.925,-22.905 6.925,-22.6 ; 6.925,-22.6 7.3,-22.225 ; 7.3,-22.225 7.275,-22.225 6.475,-23.025 6.475,-23.325 9.075,-25.925 9.425,-25.925 ; 7.4,-23.9 9.425,-25.925 ; 7.4,-23.9 7.725,-23.9 9.575,-25.75 13.65,-25.75 13.825,-25.925 ; 9.425,-25.925 13.45,-25.925 ; 13.45,-25.925 13.825,-25.925 ; 13.45,-25.925 13.788,-26.263 14.163,-26.263 ; 13.8,-28.85 14.075,-28.85 14.736,-28.189 14.736,-26.45 ; 13.8,-28.85 14.5,-28.15 14.5,-26.6 ; 13.825,-25.925 14.163,-26.263 ; 13.825,-25.925 14.038,-25.925 ; 14.038,-25.925 14.25,-25.925 14.5,-26.175 ; 14.038,-25.925 14.5,-26.387 ; 14.163,-26.263 14.5,-26.6 ; 14.5,-26.6 14.5,-26.45 ; 14.5,-26.45 14.5,-26.387 ; 14.5,-26.45 14.736,-26.45 ; 14.5,-26.387 14.5,-26.175 ; 14.5,-26.175 15.8,-26.175 18.85,-23.125 23.75,-23.125 23.95,-23.325 ; 14.736,-26.45 15.85,-26.45 18.975,-23.325 23.95,-23.325
P1.8VB: P20D.11 P22D.8 | length 17.4
  Top Layer w0.3: P22D.8 45.92,-26.67 47.15,-27.9 P20D.11 P20D.11@57.3,-27.9
P3.3V: C8D.1 C9D.1 C10D.1 C11D.1 C12D.1 C13D.1 C17D.1 P2D.1 P2D.17 R1D.2 R2D.2 R4D.2 R6D.2 R7D.2 R8D.2 R9D.2 U1D.1 U1D.2 U2D.1 U2D.2 U2D.3 U4D.1 U4D.2 U5D.1 U5D.2 U5D.16 | length 120.4
  Top Layer w0.15: U1D.2 12.425,-22.125 12.6,-21.95 12.95,-21.95 13.075,-22.075 13.075,-22.923 U1D.1 ; U2D.3 15.175,-4.15 15.475,-3.85 15.825,-3.85 ; U2D.2 15.825,-3.85 ; U2D.1 16.475,-4.882 16.475,-4.05 16.275,-3.85 15.825,-3.85 ; R4D.2 17.8,-7.685 18.425,-7.06 18.425,-6.215 17.8,-5.59 C17D.1 C17D.1@17.8,-5.51 ; 18.56,-4.79 18.56,-4.75 ; U4D.2 23.663,-18.912 23.663,-17.937 23.825,-17.775 24.6,-17.775 24.629,-17.775 24.64,-17.764 ; 25.3,-5.162 25.487,-4.975 R6D.2 R6D.2@27.375,-5.125 ; 25.35,-9.175 R7D.2@27.385,-9.175 ; C11D.1@25.65,-13.025 27.425,-13.025 27.825,-13.425 R9D.2 ; C11D.1 C11D.1@25.65,-12.96 ; C10D.1 31,-11.3 ; R8D.2 32.05,-18.625 32.55,-18.125 32.55,-14.2 31.775,-13.425 R9D.2 ; R2D.2 R1D.2 31,-11.3 ; 31,-11.3 31,-13.4 R9D.2
  Top Layer w0.3: U1D.1@13.075,-22.923 13.098,-22.9 C12D.1 ; U2D.1@16.475,-4.882 16.498,-4.859 17.114,-4.859 17.64,-5.385 17.675,-5.385 C17D.1@17.8,-5.51 ; U4D.1 24.275,-18.261 24.6,-17.936 24.6,-17.775 C13D.1 v1(25.6,-17.1) ; U5D.16 25.525,-13.15 25.65,-13.025 C11D.1 25.625,-12.975 25.625,-12.125 v1(25.6,-12.1) ; U5D.1 24.285,-7.44 24.285,-5.515 C9D.1 v1(25.3,-5.5)
  Top Layer w0.5: C17D.1@17.8,-5.51 17.825,-5.485 17.865,-5.485 18.56,-4.79 19.375,-3.975 24.45,-3.975 ; v1(25.6,-12.1) 25.3,-11.8 v1(25.3,-11.05) v1(25.3,-5.5) 25.3,-5.162 25.3,-4.825 ; 24.45,-3.975 24.525,-3.9 v1(25.5,-3.9) 25.3,-4.1 ; 24.45,-3.975 v1(24.925,-4.45) ; v1(24.925,-4.45) 24.95,-4.45 25.3,-4.1 ; v1(24.925,-4.45) 25.3,-4.825 ; 25.3,-4.825 25.3,-4.1
  Top Layer w0.8: C12D.1@14.625,-22.6 15.2,-22.025 23.6,-22.025 25.6,-20.025 v1(25.6,-17.1)
  Bottom Layer w0.4: P2D.1 3.4,0.2 3.4,1.875 4.075,2.55 23.25,2.55 23.9,1.9 23.9,0.02 P2D.17
  Bottom Layer w0.8: P2D.17 25.19,-4.185 v1(24.925,-4.45) 24.925,-5.125 v1(25.3,-5.5) ; v1(25.3,-11.05) 25.6,-11.35 v1(25.6,-12.1) v1(25.6,-17.1) v1(25.6,-18.175)
PACK_P: P20D.21 P20D.22 P20D.23 P21D.1 | length 24.2
  Top Layer w0.3: v1@55.7,-33.4 v1@55.824,-33.524 ; P20D.23 56.2,-33.9 v1@55.824,-33.524 ; P20D.22 55.949,-33.4 v1@55.824,-33.524 ; P20D.21 56.2,-32.9 55.824,-33.276 v1(55.824,-33.4) v1@55.824,-33.524
  Top Layer w1: v1(53.9,-33.4) v1(54.9,-33.4) v1@55.7,-33.4
  Bottom Layer w1: P21D.1 45.92,-39.48 52,-33.4 55.5,-33.4 56.424,-33.4
PROG_3V: Q5D.1 Q6D.3 R6D.1 | length 59.2
  Top Layer w0.15: Q5D.1 4.75,-28.25 7.8,-31.3 18.825,-31.3 v1(19.575,-30.55) ; Q6D.3@26.325,-7.025 26.418,-7.025 26.675,-7.025 26.85,-6.85 26.85,-6.35 27.525,-5.675 28.225,-5.675 28.313,-5.587 28.313,-5.175 28.45,-5.038 28.462,-5.038 R6D.1@28.4,-5.1 ; Q6D.3@26.375,-7.075 26.418,-7.032 26.675,-7.032 29.082,-7.032 29.425,-7.375 29.425,-9.54 29.25,-9.715 v1(29.25,-11.975)
  Bottom Layer w0.15: v1(19.575,-30.55) 27.325,-30.55 30.5,-27.375 30.5,-13.225 v1(29.25,-11.975)
PROG_B: P1D.6 Q5D.3 | length 8.9
  Top Layer w0.15: P1D.6 0.2,-20.9 0.075,-21.025 0.075,-23.943 3.082,-26.95 Q5D.3
PROG_B_3V: P2D.18 Q6D.1 R7D.1 | length 12.7
  Top Layer w0.15: Q6D.1@28.225,-7.675 28.4,-7.85 v1(28.4,-8.5) 28.4,-9.15 R7D.1
  Bottom Layer w0.15: P2D.18 26.4,0.06 26.4,-6.575 28.325,-8.5 v1(28.4,-8.5)
RPI_5V: C7D.1 P2D.2 P2D.4 Q10D.1 Q10D.2 Q10D.5 Q10D.6 | length 45.2
  Top Layer w0.5: v1(10.3,-17.3) v1(11.2,-17.3) ; Q10D.5 v1(11.2,-17.3) ; Q10D.2 v1(11.2,-17.3) ; Q10D.6 v1(12.15,-17.3) ; Q10D.1 v1(12.15,-17.3) ; C7D.1 13.1,-17.675 v1(13.1,-17.3) v1(12.15,-17.3) ; v1(11.2,-17.3) v1(12.15,-17.3)
  Bottom Layer w0.5: P2D.2 4.875,1.275 6.14,1.275 ; 6.14,1.275 6.14,-3.725 7.3,-3.725 8.65,-2.375 8.65,0.03 P2D.4 7.405,1.275 6.14,1.275
  Bottom Layer w1: 6.14,-3.725 5.15,-4.715 5.15,-16.35 6.1,-17.3 v1(11.2,-17.3) v1(12.15,-17.3) v1(13.1,-17.3)
RPI_URXD: P2D.10 U4D.6 U5D.6 | length 26.6
  Top Layer w0.15: U4D.6 21.025,-17.6 18.65,-15.225 18.65,-11.775 v1(21.025,-9.4) U5D.6
  Bottom Layer w0.15: P2D.10 15.03,1.12 16.325,-0.175 16.325,-1.9 18.375,-3.95 18.375,-4.925 21.025,-7.575 v1(21.025,-9.4)
RPI_UTXD: P2D.8 U4D.4 U5D.4 | length 32.5
  Top Layer w0.15: U4D.4 22.325,-17.397 22.075,-17.147 22.075,-16.625 21.625,-16.175 20.275,-16.175 19,-14.9 19,-12.225 22.325,-8.9 U5D.4
  Bottom Layer w0.15: P2D.8 13.75,0.01 13.75,-8.175 16.9,-11.325 v1(19.9,-11.325)
SPK+: P20D.2 P24D.1 | length 8.3
  Top Layer w0.2: 55.15,-23.275 55.275,-23.4 P20D.2
  Top Layer w0.4: P24D.1 53.3,-21.659 ccw(c53.7,-21.659) 53.417,-21.942 54.75,-23.275 55.15,-23.275 55.213,-23.275
SPK-: P20D.1 P24D.2 | length 11.9
  Top Layer w0.2: 56,-22.422 56.478,-22.9 P20D.1
  Top Layer w0.4: P24D.2 55.883,-15.503 cw(c55.6,-15.786) 56,-15.786 56,-22.422
UART_FPGA_SEL: P2D.12 Q7D.1 R9D.1 U5D.14 U5D.15 | length 31.3
  Top Layer w0.15: v1(22.75,-15.075) 23.2,-14.625 23.2,-14.5 ; U5D.14 22.975,-14.275 23.2,-14.5 ; U5D.15 23.625,-14.525 ; R9D.1 31.023,-14.427 31.023,-14.877 30.201,-15.7 29.75,-15.7 Q7D.1 29.225,-15.875 28.575,-15.225 24.325,-15.225 23.625,-14.525 ; 23.2,-14.5 23.6,-14.5 23.625,-14.525
  Bottom Layer w0.15: P2D.12 18.825,0.015 18.825,-2.725 19.475,-3.375 19.475,-4.901 22.025,-7.451 22.025,-12.925 22.75,-13.65 v1(22.75,-15.075)
UP5K_CSN: P1D.22 U2D.11 | length 15.5
  Top Layer w0.15: P1D.22@0.4,-12.9 P1D.22 1.525,-12.9 3.125,-11.3 8.5,-11.3 10.3,-9.5 12.9,-9.5 13.225,-9.825 U2D.11
UP5K_CSN_3V: P2D.24 U2D.6 | length 24
  Top Layer w0.15: U2D.6 13.225,-3.85 14.55,-2.525 15.9,-2.525 16.325,-2.1 16.325,-0.55 16.875,0 31.54,0 P2D.24
UP5K_MISO: P1D.20 U1D.10 | length 22.8
  Top Layer w0.15: P1D.20@0.4,-13.9 P1D.20 1.8,-13.9 2.925,-12.775 v1(3.225,-12.775) ; v1(6.85,-27.075) 7.375,-27.6 9,-27.6 9.175,-27.775 U1D.10
  Bottom Layer w0.15: v1(3.225,-12.775) 3.95,-13.5 3.95,-20.55 5.775,-22.375 5.775,-26 v1(6.85,-27.075)
UP5K_MISO_3V: P2D.21 U1D.7 | length 44.3
  Top Layer w0.15: U1D.7 9.175,-22.125 10.275,-21.025 15.4,-21.025 15.85,-20.575 18.5,-20.575 18.85,-20.225 22.675,-20.225 v1(23.2,-20.75)
  Bottom Layer w0.15: v1(23.2,-20.75) 27.4,-20.75 29.325,-18.825 29.325,-14.275 28.125,-13.075 28.125,-11.4 28.725,-10.8 29.3,-10.8 29.35,-10.85 30.8,-10.85 31.55,-10.1 31.55,-8.075 30.27,-6.795 P2D.21
UP5K_MON0: P1D.8 U5D.13 | length 56.8
  Top Layer w0.15: P1D.8 0.044,-19.9 -0.525,-20.469 -0.525,-24.192 6.692,-31.408 7.454,-32.17 20.93,-32.17 21.8,-31.3 v1(21.8,-29.7) ; U5D.13 22.325,-14.35 22.1,-14.575 22.1,-15.275 22.425,-15.6 23.175,-15.6 23.325,-15.45 24,-15.45 24.225,-15.675 26.25,-15.675 27,-16.425 27,-24.325 v1(25.702,-25.623)
  Bottom Layer w0.15: v1(21.8,-29.7) 23.35,-29.7 25.702,-27.348 v1(25.702,-25.623)
UP5K_MON1: P1D.7 U5D.11 | length 55.7
  Top Layer w0.15: P1D.7 0.05,-20.4 -0.225,-20.675 -0.225,-24.067 7.408,-31.7 20.7,-31.7 21,-31.4 v1(21,-28.75) ; U5D.11 21.025,-14.825 22.125,-15.925 23.274,-15.925 23.449,-15.75 23.85,-15.75 24.1,-16 26.075,-16 26.625,-16.55 26.625,-23.62 v1(25.335,-24.91)
  Bottom Layer w0.15: v1(21,-28.75) 23.475,-28.75 24.775,-27.45 24.775,-25.47 v1(25.335,-24.91)
UP5K_MOSI: P1D.21 U2D.12 | length 15.1
  Top Layer w0.15: P1D.21 1.725,-13.4 3.325,-11.8 11.1,-11.8 11.5,-12.2 13.658,-12.2 13.875,-11.983 U2D.12
UP5K_MOSI_3V: P2D.19 U2D.5 | length 16.2
  Top Layer w0.15: U2D.5 13.875,-4.125 15.1,-2.9 16.9,-2.9 17.225,-2.575 26.425,-2.575 P2D.19
UP5K_SCK: P1D.19 U2D.13 | length 16.7
  Top Layer w0.15: P1D.19@0.4,-14.4 1.9,-14.4 2.825,-13.475 6.925,-13.475 8.1,-12.3 10.9,-12.3 11.3,-12.7 14.1,-12.7 14.525,-12.275 U2D.13
UP5K_SCK_3V: P2D.23 U2D.4 | length 20.6
  Top Layer w0.15: U2D.4 14.525,-4.125 15.225,-3.425 17.5,-3.425 17.9,-3.025 31.055,-3.025 P2D.23
VBUS: C5D.1 P1D.13 P1D.14 P1D.15 Q3D.1 Q3D.2 Q3D.5 Q3D.6 | length 17.8
  Top Layer w0.3: P1D.13 1.65,-17.4 ccw(c1.65,-17.1) 1.862,-17.312 1.961,-17.213 cw(c2.173,-17.425) 2.173,-17.125 3.451,-17.125 ; P1D.14 3.6,-16.9 C5D.1@3.7,-17 ; P1D.15 3.282,-16.4 3.691,-16.809 3.909,-16.809 C5D.1
  Top Layer w0.5: Q3D.1 6.05,-17.3 ; Q3D.6 6.05,-17.3 ; Q3D.2 7,-17.3 ; Q3D.5 7,-17.3 ; 6.05,-17.3 7,-17.3
  Top Layer w0.8: C5D.1@3.7,-17 3.9,-17.2 4,-17.3 6.05,-17.3
VBUS_EN: P2D.40 Q4D.1 R5D.2 | length 58.2
  Top Layer w0.15: R5D.2 4.875,-7.525 4.875,-6.525 Q4D.1 7.875,-6.35 8.575,-5.65 8.575,1.9 9.225,2.55 51.85,2.55 P2D.40
VIBE_DRIVE: P20D.8 P22D.15 | length 29.2
  Top Layer w0.15: P22D.15 39.075,-10.19 39.075,-14.6 39.725,-15.25 41.65,-15.25 52.8,-26.4 P20D.8
VSYS_U: P20D.18 P22D.2 | length 21.2
  Top Layer w0.2: 55.15,-31.55 55.425,-31.275 56.25,-31.275 56.375,-31.4 P20D.18
  Top Layer w0.5: P22D.2 42.383,-41.91 ccw(c42.383,-41.41) 42.736,-41.764 52.804,-31.696 cw(c53.157,-32.05) 53.157,-31.55 55.2,-31.55
pads on no net: P1D.0 P1D.12 P1D.17 P2D.3 P2D.5 P2D.26 P2D.27 P2D.28 P2D.29 P2D.31 P2D.32 P2D.33 P2D.35 P2D.36 P2D.37 P2D.38 P20D.0 U2D.10 U4D.7 U5D.7 U5D.12

## Polygon pours and split planes (outlines as drawn)
P3.3V on Top Layer "P3.3V_L01_P004" (solid, remove dead copper, pour order 4): 3.275,3 3.275,-0.925 0.575,-3.625 -2.975,-3.625 -3,-3.6 -3,-31.625 1.475,-36.1 24.8,-36.1 36.775,-24.125 36.775,2.975
GND on Bottom Layer "GND_L02_P005" (solid, remove dead copper, pour order 5): -3.05,0.175 cw(c-3.05,0.125) -3,0.125 -3,-49.41 ccw(c-0.46,-49.41) -0.46,-51.95 58.55,-51.95 ccw(c58.55,-49.6) 60.9,-49.6 60.9,0.56 ccw(c58.36,0.56) 58.36,3.1 -0.385,3.1 ccw(c-0.385,0.56) -2.925,0.56 -2.925,-0.05

## Keep-outs
Keep-Out Layer:
  the board outline again, w0.2

## Other copper
Top Layer:
  region net GND: 20.625,-51.75 20.625,-47.75 3.45,-47.75 3.45,-51.75
  region net GND: 37.5,-51.75 37.5,-47.75 32.25,-47.75 32.25,-51.75
  region net GND: 60.75,-3.5 56.75,-3.5 56.75,-8.75 60.75,-8.75
  rectangle net GND: -2.75,-46.15 1.25,-28.2
Bottom Layer:
  rectangle net GND: 56.1,-6.9 58.5,-5.1
  rectangle net GND: 33.7,-49.5 35.8,-47.6
  rectangle net GND: 3.55,-51.7 20.625,-47.725
  rectangle net GND: -2.75,-46.15 1.225,-28.25

## Silkscreen, mask and mechanical layers (free items; w line width, h text height)
Top silk (Pantone 431C):
  drawing of 12 lines, arcs and shapes, not listed
  text "1" at 3,-1.794 h1.5
  text "JTAG Debug" at -2.238,-2.7 h1.3 r270
  text "GPIO0" at 41.9,-4.351 h1.3
  text "Note: GPIO are 3.3V!" at 46.1,-6.432 h1.3
  text "GPIO1" at 41.9,-6.722 h1.3
  text "VIBE" at 41.9,-9.322 h1.3
  text "GND" at 41.9,-11.822 h1.3
  text "GPIO2" at 41.9,-14.422 h1.3
  text "GND" at 41.9,-16.922 h1.3
  text "FPGA Debug and Programming" at 31.523,-18.1 h1.3 r270
  text "+ SPK -" at 46.8,-18.1 h1.8 r90
  text "GND" at 41.9,-19.422 h1.3
  text "1" at 57.122,-21.5 h1.3 r90
  text "SCL (1.8V)" at 41.9,-22.604 h1.3
  text "1" at 1.8,-24.8 h1.5
  text "SDA / (1.8V)" at 41.9,-25.4 h1.3
  text "1.8V" at 41.9,-27.329 h1.3
  text "GPIO3" at 41.9,-29.622 h1.3
  text "Top FPC Breakout" at 37.638,-30.6 h1.3 r90
  text "Top FPC Breakout" at 56.737,-31 h1.3 r90
  text "GPIO4" at 41.9,-32.122 h1.3
  text "CERN OHL L" at 45.7,-33.4 h1.8
  text "GPIO7" at 41.9,-34.722 h1.3
  text "GPIO6" at 41.9,-37.222 h1.3
  text "+ BAT -" at 45.7,-37.5 h1.8
  text "-" at 51.9,-40.134 h2 r180
  text "GPIO5" at 36.682,-40.782 h1.3 r45
  text "Debug HAT" at 9.078,-42.566 h2.5
  text "+" at 48.333,-42.7 h2 r90
  text "VSYS" at 36.963,-43.363 h1.3 r45
  text "v4a" at 7.7,-45 h1.8
  text "09/21" at 12,-45 h1.8
  text "bunnie" at 17.5,-45 h1.8
  text "TS" at 37.363,-45.263 h1.3 r45
  text "https://precursor.dev" at 8.6,-46.9 h1.5
Bottom silk (Pantone 431C):
  text "+" at 46.9,-40.734 h2 r180
  text "-" at 51.9,-40.8 h2 r180
Top Solder (Pantone 7452C):
  region: 20.675,-51.75 20.675,-47.75 3.45,-47.75 3.45,-51.75
  region: 37.5,-51.75 37.5,-47.75 32.25,-47.75 32.25,-51.75
  region: 60.75,-3.5 56.75,-3.5 56.75,-8.75 60.75,-8.75
  rectangle: -2.75,-46.15 1.125,-28.35
Bottom Solder (Pantone 7452C):
  rectangle: 3.475,-51.875 20.75,-47.775
  rectangle: 29.75,-51.75 39.75,-47.75
  rectangle: 56.75,-10 60.75,-2.75
  rectangle: -2.75,-46.175 1.25,-27.975
Mechanical 1:
  the board outline again, w0.2
Bottom Assembly:
  drawing of 199 lines, arcs and shapes, not listed
  text "Panelize as 2x2 with V-score, no rails" at 6.3,5.975 h1.2
  text "NOTE: soldermask color change from v1" at 75,0.25 h1
  text "Layer" at 68.497,-2.096 h1
  text "Name" at 75.504,-2.096 h1
  text "Material" at 105.503,-2.096 h1
  text "Thickness" at 120.007,-2.096 h1
  text "Constant" at 131.013,-2.096 h1
  text "Board Layer Stack" at 140.685,-2.096 h1
  text "Top silk (Pantone 431C)" at 75.504,-4.096 h1
  text "Top Solder (Pantone 7452C)" at 75.504,-6.096 h1
  text "Solder Resist" at 105.503,-6.096 h1
  text "0.010mm" at 120.007,-6.096 h1
  text "3.5" at 131.013,-6.096 h1
  text "1" at 68.497,-8.096 h1
  text "Top Layer" at 75.504,-8.096 h1
  text "0.036mm" at 120.007,-8.096 h1
  text "Dielectric 2" at 75.504,-10.096 h1
  text "FR-4" at 105.503,-10.096 h1
  text "1.500mm" at 120.007,-10.096 h1
  text "4.2" at 131.013,-10.096 h1
  text "2" at 68.497,-12.096 h1
  text "Bottom Layer" at 75.504,-12.096 h1
  text "0.036mm" at 120.007,-12.096 h1
  text "Bottom Solder (Pantone 7452C)" at 75.504,-14.096 h1
  text "Solder Resist" at 105.503,-14.096 h1
  text "0.010mm" at 120.007,-14.096 h1
  text "3.5" at 131.013,-14.096 h1
  text "Bottom silk (Pantone 431C)" at 75.504,-16.096 h1
  text "Total board thickness:" at 68.497,-18.096 h1
  text "1.592mm" at 120.007,-18.096 h1
  text "Finish - Immersion Gold" at 68.5,-20.75 h1
  text "Soldermask 7452C composition: Purple ink 52%, White ink 25%, Blue ink 23%" at 67.925,-28.025 h1.2

## Text inside footprints (layer, text, board x,y; h text height)
P2D: Bottom silk (Pantone 431C) "1" at 2.47,-0.63 h1.27 r180